# Altium PCB MFRC522开发学习板.PcbDoc
Units mil, origin at the board's own origin, x right, y up, seen from the top; angles counter-clockwise.
Board outline 3937.01 x 2165.35 mil, 2 copper layers (TOP, BOTTOM); 62 components, 68 nets, 275 pads, 250 vias.
Unrouted connection lines stored in the file: 10.
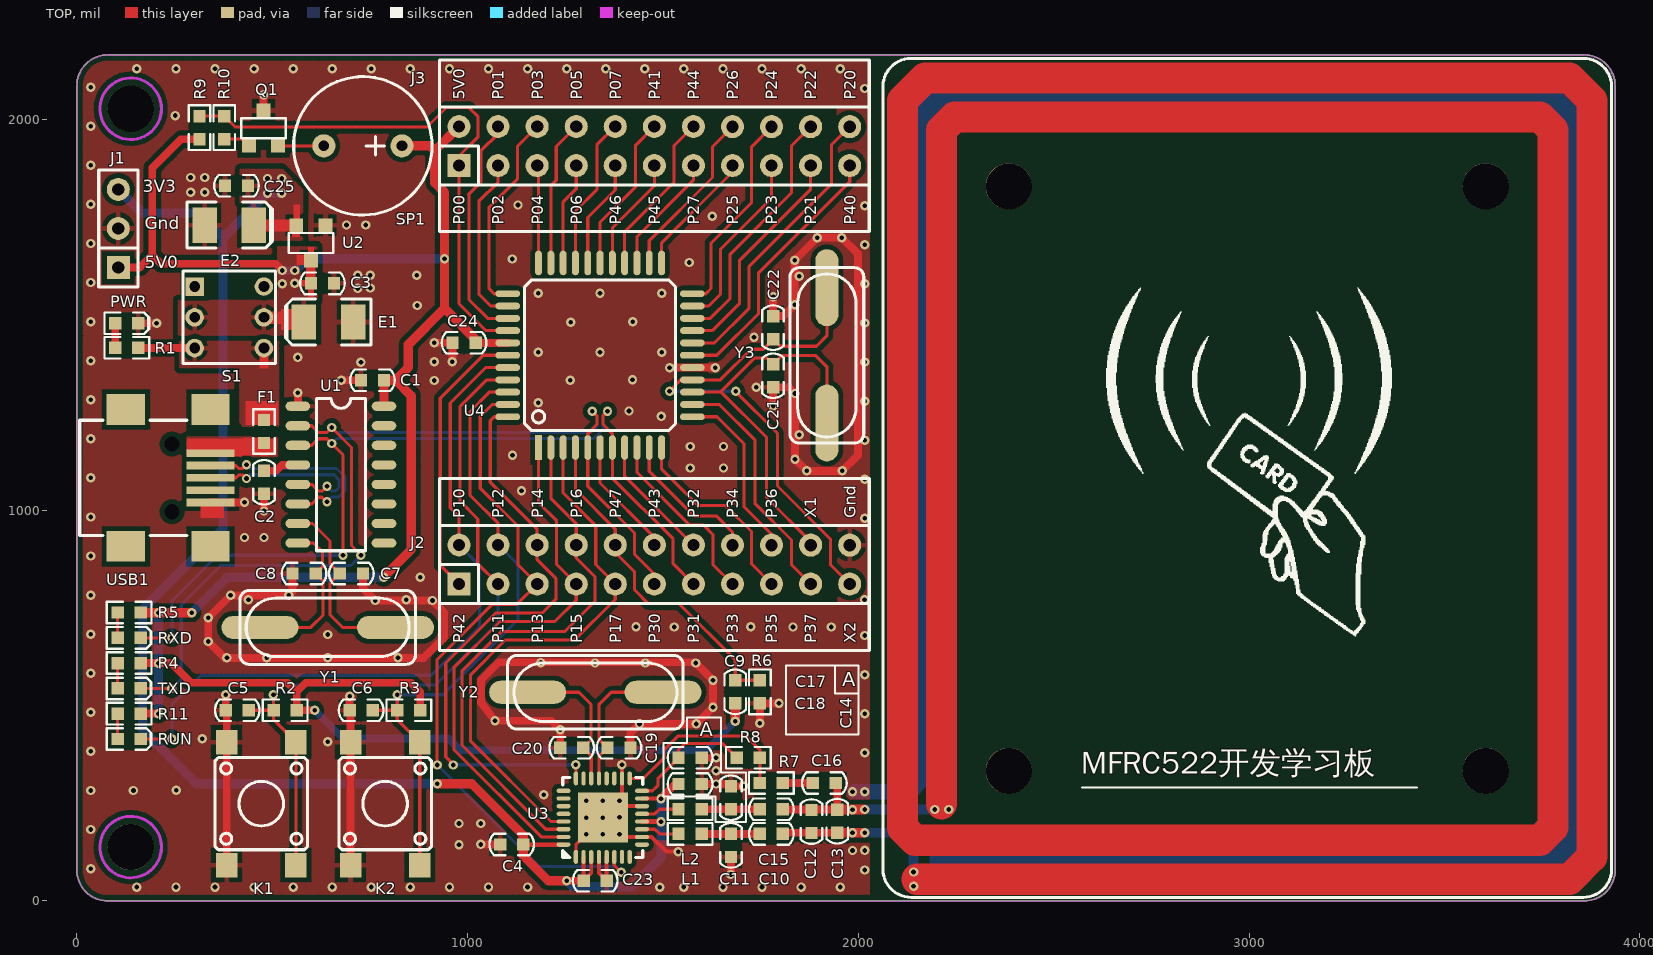
[diagram p0: TOP view]
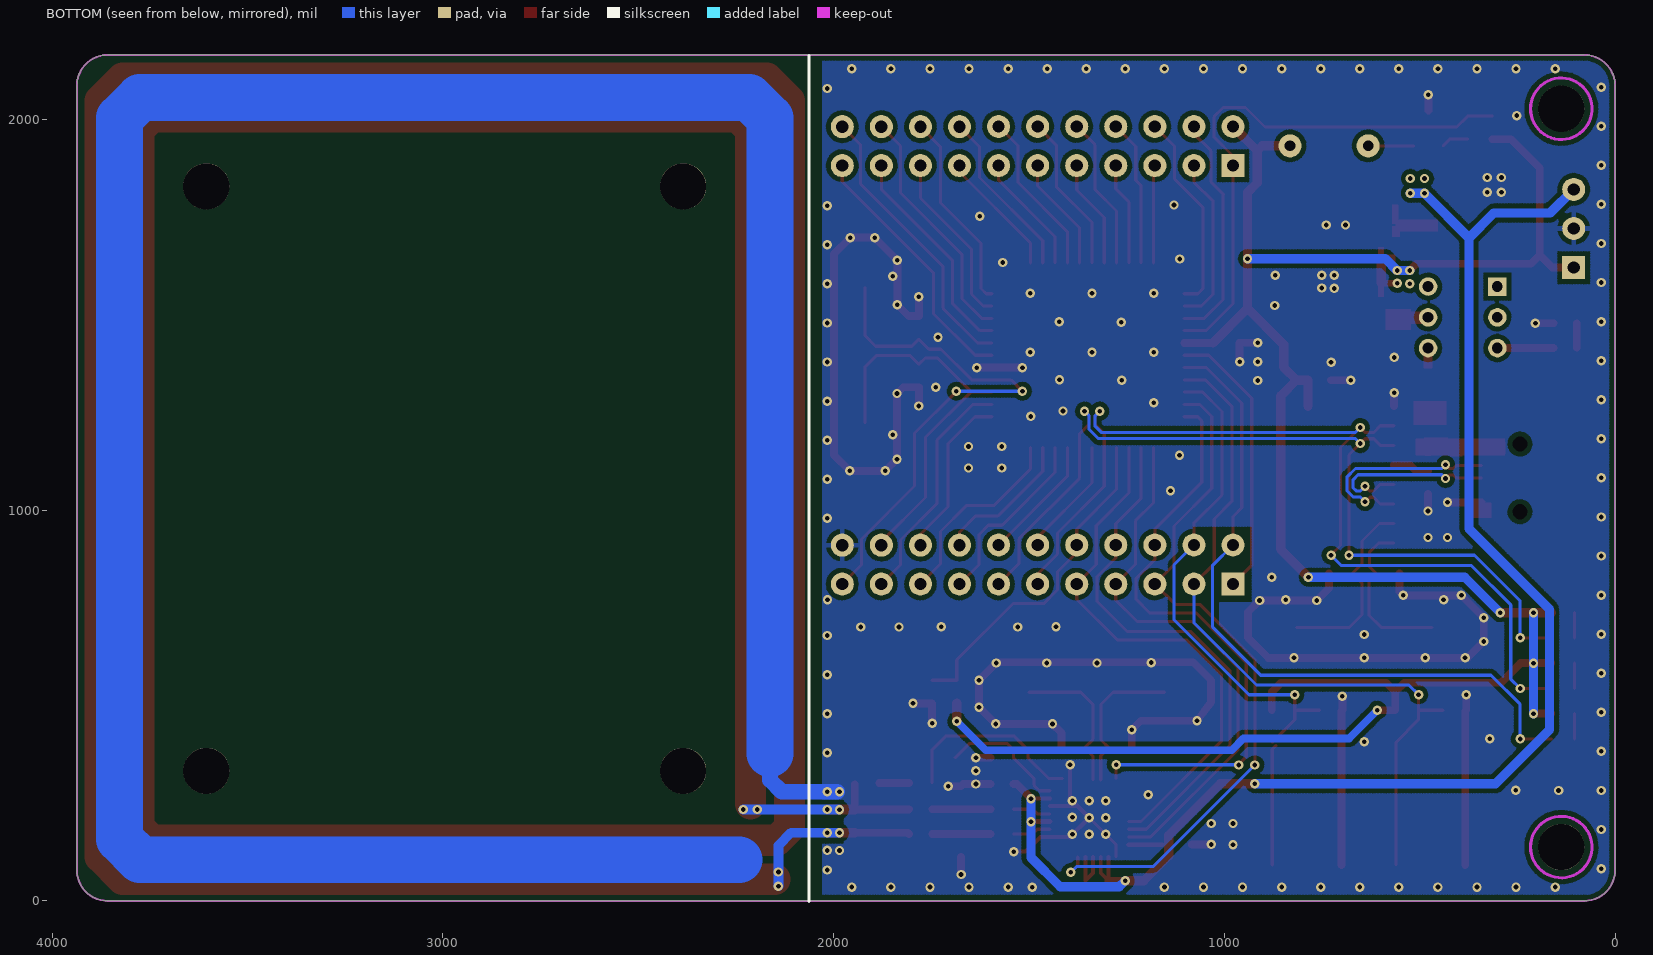
[diagram p1: BOTTOM view, seen from below]

## Layer stack, top to bottom
TOP: signal copper 1.4
Dielectric: dielectric 12.6, FR-4, Dk 4.8
BOTTOM: signal copper 1.4

## Board outline
0,78.74 ccw(c78.74,78.74) 78.74,0 3858.27,0 ccw(c3858.27,78.74) 3937.01,78.74 3937.01,2086.61 ccw(c3858.27,2086.61) 3858.27,2165.35 78.74,2165.35 ccw(c78.74,2086.61) 0,2086.61

## Design rules (kind name [scope] priority, off if disabled: settings)
Clearance POLY-ALL [INPolygon] p1: gap=12
Clearance ALL [All] p2: gap=8
ComponentClearance [All] p1: gap=10 collisioncheckmode=3 verticalgap=10
DiffPairsRouting CH340 [InDifferentialPairClass('All Differential Pairs')] p1: maxlimit=10 minlimit=8 mostfreqgap=8 maxuncoupledlength=500
DiffPairsRouting USB [InDifferentialPairClass('USB')] p2: maxlimit=10 minlimit=8 mostfreqgap=8 maxuncoupledlength=500
DiffPairsRouting [All] p3: maxlimit=10 minlimit=10 mostfreqgap=10 maxuncoupledlength=500
PolygonConnect VIA-POLY [IsVia vs IsPolygon] p1: connectstyle=Direct reliefconductorwidth=10 reliefentries=4 polygonreliefangle="90 Angle"
PolygonConnect [All] p2: connectstyle=Relief reliefconductorwidth=12 reliefentries=4 polygonreliefangle="90 Angle"
RoutingVias [All] p1: holewidth=12 width=24 viastyle="Through Hole" minholewidth=12 minwidth=24 maxholewidth=12 maxwidth=24
SolderMaskExpansion [All] p1: expansion=2.5
TestPointUsage FabricationTestPointUsage [All] p1: valid=0 allowmultiple=FALSE
Testpoint FabricationTestpoint [All] p1: side=3 testpointundercomponent=TRUE minsize=40 maxsize=100 preferedsize=60 minholesize=0 maxholesize=40 preferedholesize=32 testpointgrid=1 style=297 order=0-112345678
Width PWR [InNetClass('PWR')] p1: maxlimit=200 minlimit=4 preferedwidth=20
Width [All] p2: maxlimit=200 minlimit=8 preferedwidth=8
17 further rules are at their usual default settings.

## Classes and differential pairs
differential pair class USB: USB
net class PWR: +3.3V +5V GND NetF1_2 VBUS
differential pair class CH340: CH340
differential pair USB: +NetU1_5 -NetU1_6
differential pair CH340: +CH340_RXD -CH340_TXD

## Components (designator, comment, footprint, x,y, rotation, side; value= is the part's Value field where it differs from the comment)
C1 "100nF" CAP-0603 756.47,1332.61 r0 top
C2 "10nF" CAP-0603 479,1071.47 r270 top
C3 "100nF" CAP-0603 628.53,1580.61 r180 top
C4 "100nF" CAP-0603 1113,144.61 r0 top
C5 "100nF" CAP-0603 410.53,488 r180 top
C6 "100nF" CAP-0603 727.53,488 r180 top
C7 "15pF" CAP-0603 702.53,838 r180 top
C8 "15pF" CAP-0603 581.47,838 r0 top
C9 "100nF" CAP-0603 1685,535.13 r90 top
C10 "27pF" CAP-0603 1777.47,171.61 r0 top
C11 "47pF" CAP-0603 1674,142.08 r270 top
C12 "56pF" CAP-0603 1880,203.13 r270 top
C13 "56pF" CAP-0603 1946,204.13 r90 top
C14 "47pF" CAP-0603 1674,264.13 r270 top
C15 "27pF" CAP-0603 1777.47,234.61 r0 top
C16 "15pF" CAP-0603 1913,301.61 r0 top
C17 "100nF" CAP-0603 1569.53,366.61 r0 top
C18 "100nF" CAP-0603 1569.53,299.11 r0 top
C19 "15pF" CAP-0603 1387.53,392 r0 top
C20 "15pF" CAP-0603 1266.47,392 r180 top
C21 "15pF" CAP-0603 1782,1344.08 r90 top
C22 "15pF" CAP-0603 1782,1467.13 r270 top
C23 "100nF" CAP-0603 1326.53,51.61 r0 top
C24 "100nF" CAP-0603 991,1428.61 r0 top
C25 "100nF" CAP-0603 408.47,1830.61 r0 top
E1 "47uF" CASE-B-3528 644,1481.61 r0 top
E2 "47uF" CASE-B-3528 390.01,1729.61 r180 top
F1 "0.5A" FUS-0603 479,1201.53 r90 top
J1 "1*3P" PHDR2.54-1*3P-180 106,1721 r90 top
J2 "2*11P" PHDR2.54-2*11P-180 1478,861 r0 top
J3 "2*11P" PHDR2.54-2*11P-180 1478,1932 r0 top
K1 "12*12*4.3H" SW4-SMD6*6 472,249 r90 top
K2 "12*12*4.3H" SW4-SMD6*6 789,249 r90 top
L1 "2.2uH" IND-0603 1569.53,171.61 r0 top
L2 "2.2uH" IND-0603 1569.53,234.61 r0 top
PWR "RED" LED-0603-B 127.79,1478.61 r0 top
Q1 "Y2" SOT-23-3 477.6,1977.88 r0 top
R1 "510R" RES-0603 127.79,1415.61 r180 top
R2 "10K" RES-0603 533,488 r180 top
R3 "10K" RES-0603 849.53,488 r180 top
R4 "510R" RES-0603 133.79,608.61 r180 top
R5 "510R" RES-0603 133.79,737.94 r180 top
R6 "10K" RES-0603 1748,535.13 r270 top
R7 "5.1K" RES-0603 1777.47,301.61 r0 top
R8 "820R" RES-0603 1718.47,366.61 r0 top
R9 "10K" RES-0603 314,1979.08 r270 top
R10 "1K" RES-0603 377,1979.13 r270 top
R11 "510R" RES-0603 133.79,479.27 r180 top
RUN "RED" LED-0603-R 133.79,414.61 r0 top
RXD "GREEN" LED-0603-G 133.79,673.27 r0 top
S1 "2*3P" 5.8自锁开关 390,1493.61 r270 top
SP1 "5V" BUZZER-9MM 732,1932.61 r180 top
TXD "RED" LED-0603-R 133.79,543.94 r0 top
U1 "CH340G" SOP-16 675.76,1091 r0 top
U2 "XC6206" SOT-23-3 599,1683.88 r180 top
U3 "MFRC522" HVQFN-32 1345.98,212.99 r0 top
U4 "STC12C5A60S2" LQFP-44 1339,1396.61 r0 top
USB1 "MinuUSB" "MINI USB" 342,1082.68 r270 top
Y1 "12MHZ" HC-49SMD 642,700 r0 top
Y2 "27.12MHZ" HC-49SMD 1327,534 r0 top
Y3 "12MHZ" HC-49SMD 1919.51,1396.3 r270 top
? "" 刷卡图标 3004,1339 r0 top

## Footprints (in the part's own frame and the unit in brackets; to place one, negate y for a bottom-side part, rotate by r counter-clockwise, add the part's x,y. Pads: shape width x height; smd on the part's side, far side on the other; paste and mask are expansions set on the pad)
5.8自锁开关 [mm]
  rect 1.2x1.2 hole 0.7: 1(-2,-2.25)
  round 1.2 hole 0.7: 2(-2,2.25) 3(0,-2.25) 4(0,2.25) 5(2,-2.25) 6(2,2.25)
  silkscreen extent -3,-3 3,3, body extent -2.9,-2.9 2.9,2.9, height 10
BUZZER-9MM [mm]
  round 1.5 hole 0.7: 1(-2.54,0) 2(2.54,0)
  silkscreen extent -4.5,-4.5 4.5,4.5, body extent -4.55,-4.55 4.55,4.55, height 5.7
CAP-0603 [mm]
  rect 0.8x0.8 smd: 1(-0.75,0) 2(0.75,0)
  silkscreen extent -1.45,-0.7 1.45,0.7, body extent -0.8,-0.4 0.8,0.4, height 0.6
CASE-B-3528 [mm]
  rect 1.6x2.3 smd mask+0.102: 1(-1.6,0)
  rect 1.6x2.3 smd: 2(1.6,0)
  silkscreen extent -2.79,-1.5 2.75,1.5, body extent -1.85,-1.47 1.85,1.47, height 2.03
FUS-0603 [mm]
  rect 0.8x0.8 smd: 1(-0.75,0) 2(0.75,0)
  silkscreen extent -1.45,-0.7 1.45,0.7, body extent -0.83,-0.42 0.83,0.42, height 0.36
HC-49SMD [mm]
  oval 5x1.5 smd: 1(-4.4,0) 2(4.4,0)
  silkscreen extent -5.7,-2.4 5.7,2.4, body extent -6.4,-2.41 6.4,2.42, height 4.3
HVQFN-32 [mm] "QFN, 32-Leads, Body 5.1x5.1mm (max), Pitch 0.50mm, IPC Medium Density"
  rect 3.25x3.25 smd: 0(0,0)
  oval 0.28x0.9 smd: 1(-1.75,-2.55) 2(-1.25,-2.55) 3(-0.75,-2.55) 4(-0.25,-2.55) 5(0.25,-2.55) 6(0.75,-2.55) 7(1.25,-2.55) 8(1.75,-2.55) 17(1.75,2.55) 18(1.25,2.55) 19(0.75,2.55) 20(0.25,2.55) 21(-0.25,2.55) 22(-0.75,2.55) 23(-1.25,2.55) 24(-1.75,2.55)
  oval 0.9x0.28 smd: 9(2.55,-1.75) 10(2.55,-1.25) 11(2.55,-0.75) 12(2.55,-0.25) 13(2.55,0.25) 14(2.55,0.75) 15(2.55,1.25) 16(2.55,1.75) 25(-2.55,1.75) 26(-2.55,1.25) 27(-2.55,0.75) 28(-2.55,0.25) 29(-2.55,-0.25) 30(-2.55,-0.75) 31(-2.55,-1.25) 32(-2.55,-1.75)
  silkscreen extent -2.6,-2.6 2.6,2.6, body extent -2.51,-2.52 2.51,2.5, height 0.8
IND-0603 [mm]
  rect 0.8x0.8 smd: 1(-0.75,0) 2(0.75,0)
  silkscreen extent -1.45,-0.7 1.45,0.7, body extent -0.8,-0.4 0.8,0.4, height 0.9
LED-0603-B [mm]
  rect 0.8x0.8 smd: 1(-0.75,0)
  rect 0.8x0.8 smd mask+0.102: 2(0.75,0)
  silkscreen extent -1.45,-0.7 1.45,0.7, body extent -0.81,-0.4 0.81,0.4, height 0.6
LED-0603-G [mm]
  rect 0.8x0.8 smd: 1(-0.75,0)
  rect 0.8x0.8 smd mask+0.102: 2(0.75,0)
  silkscreen extent -1.45,-0.7 1.45,0.7, body extent -0.81,-0.4 0.81,0.4, height 0.6
LED-0603-R [mm]
  rect 0.8x0.8 smd: 1(-0.75,0)
  rect 0.8x0.8 smd mask+0.102: 2(0.75,0)
  silkscreen extent -1.45,-0.7 1.45,0.7, body extent -0.81,-0.4 0.81,0.4, height 0.6
LQFP-44 [mm]
  rect 0.45x1.6 smd: 1(-4,-6)
  oval 0.45x1.6 smd: 2(-3.2,-6) 3(-2.4,-6) 4(-1.6,-6) 5(-0.8,-6) 6(0,-6) 7(0.8,-6) 8(1.6,-6) 9(2.4,-6) 10(3.2,-6) 11(4,-6) 23(4,6) 24(3.2,6) 25(2.4,6) 26(1.6,6) 27(0.8,6) 28(0,6) 29(-0.8,6) 30(-1.6,6) 31(-2.4,6) 32(-3.2,6) 33(-4,6)
  oval 1.6x0.45 smd: 12(6,-4) 13(6,-3.2) 14(6,-2.4) 15(6,-1.6) 16(6,-0.8) 17(6,0) 18(6,0.8) 19(6,1.6) 20(6,2.4) 21(6,3.2) 22(6,4) 34(-6,4) 35(-6,3.2) 36(-6,2.4) 37(-6,1.6) 38(-6,0.8) 39(-6,0) 40(-6,-0.8) 41(-6,-1.6) 42(-6,-2.4) 43(-6,-3.2) 44(-6,-4)
  silkscreen extent -4.9,-4.9 4.9,4.9, body extent -6,-6 6,6, height 1.5
"MINI USB" [mm]
  round 0 hole 1: 0(-2.2,-2.5) 0(2.2,-2.5)
  rect 0.5x3.1 smd: 1(-1.6,0) 2(-0.8,0) 3(0,0) 4(0.8,0) 5(1.6,0)
  rect 2x2.5 smd: 6(-4.45,0) 7(4.45,0) 8(-4.45,-5.5) 9(4.45,-5.5)
  silkscreen extent -3.75,-8.5 3.75,-1.52, body extent -4.95,-8.51 4.95,1.14, height 3.9
PHDR2.54-1*3P-180 [mm]
  rect 1.5x1.5 hole 0.8: 1(-2.54,0)
  round 1.5 hole 0.8: 2(0,0) 3(2.54,0)
  silkscreen extent -3.81,-1.27 3.81,1.27, body extent -3.81,-1.27 3.81,1.27, height 10.15
PHDR2.54-2*11P-180 [mm]
  rect 1.5x1.5 hole 0.8: 1(-12.7,-1.27)
  round 1.5 hole 0.8: 2(-12.7,1.27) 3(-10.16,-1.27) 4(-10.16,1.27) 5(-7.62,-1.27) 6(-7.62,1.27) 7(-5.08,-1.27) 8(-5.08,1.27) 9(-2.54,-1.27) 10(-2.54,1.27) 11(0,-1.27) 12(0,1.27) 13(2.54,-1.27) 14(2.54,1.27) 15(5.08,-1.27) 16(5.08,1.26) 17(7.62,-1.27) 18(7.62,1.26) 19(10.16,-1.27) 20(10.16,1.26) 21(12.7,-1.27) 22(12.7,1.26)
  silkscreen extent -13.97,-2.54 13.97,2.54, body extent -13.97,-2.54 13.97,2.54, height 8.67
RES-0603 [mm]
  rect 0.8x0.8 smd: 1(-0.75,0) 2(0.75,0)
  silkscreen extent -1.45,-0.7 1.45,0.7, body extent -0.8,-0.4 0.8,0.4, height 0.45
SOP-16 [mm]
  oval 1.6x0.6 smd: 1(-2.8,4.445) 2(-2.8,3.175) 3(-2.8,1.905) 4(-2.8,0.635) 5(-2.8,-0.635) 6(-2.8,-1.905) 7(-2.8,-3.175) 8(-2.8,-4.445) 9(2.8,-4.445) 10(2.8,-3.175) 11(2.8,-1.905) 12(2.8,-0.635) 13(2.8,0.635) 14(2.8,1.905) 15(2.8,3.175) 16(2.8,4.445)
  silkscreen extent -1.6,-4.94 1.6,4.94, body extent -3.04,-4.98 3.1,4.99, height 1.73
SOT-23-3 [mm]
  rect 0.9x0.9 smd: 1(-0.95,-1.15) 2(0.95,-1.15) 3(0,1.15)
  silkscreen extent -1.45,-0.65 1.45,0.65, body extent -1.45,-1.4 1.45,1.4, height 1.2
SW4-SMD6*6 [mm]
  rect 1.6x1.4 smd: 1(-4,2.25) 2(4,2.25) 3(-4,-2.25) 4(4,-2.25)
  silkscreen extent -3,-3 3,3, body extent -4.06,-3.01 4.15,3.09, height 3.8
刷卡图标 [mil]
  silkscreen extent -369,-660 361,230

## Part data
C1 C2 C3 C4 C5 C6 C7 C8 C9 C10 C11 C12 C13 C14 C15 C16 C17 C18 C19 C20 C21 C22 C23 C24 C25: library part CAP1
E1 E2: library part CAP+
F1: library part FUSE
J1: library part HDR1*3
J2 J3: library part HDR2*11
K1 K2: library part KEY2
L1 L2: library part IND
PWR RUN RXD TXD: library part LED1
Q1: library part PNP
R1 R2 R3 R4 R5 R6 R7 R8 R9 R10 R11: library part RES1
S1: library part HDR2*3
SP1: library part BEEP
U3: library part RC522
U4: library part STC12C5Axx-LQFP44
USB1: library part MiniUSB
Y1 Y2 Y3: library part XTAL

## Free pads (board coordinates)
  round 118.11 hole 118.11 unplated: 0(137.8,137.8) 0(2385.27,332.82) 0(2385.27,1828.89) 0(3605.74,332.82) 0(3605.74,1828.89) 4(137.8,2027.56)

## Via types
v1: diameter 24, hole 12, TOP to BOTTOM, tented both sides, 250 vias

## Nets (pads, with @x,y where several pads share a name; then routed paths per layer and width w, separated by ;. In a path a pad name is that pad's centre, name@x,y a point inside that pad or via, vN(x,y) a via of type N, cw(c..) or ccw(c..) an arc to the next point about the centre after c; other vN are vias at no path point)
+3.3V: C4.2 C18.1 C23.1 C25.2 E2.1 J1.3 U2.2 U3.2 U3.3 U3.12 U3.15 U3.32 | length 3985.9
  TOP w10: C23.1@1296.79,51.82 U3.2 ; C23.1 1316.47,71.08 U3.3 ; U3.15 v1@1494.45,262.21
  TOP w12: C4.2@1157.5,144.1 U3.32 ; C23.1@1296.79,51.82 C23.1 ; U3.12@1446.39,203.16 1494.45,203.16 v1(1495,202.61)
  TOP w20: v1(1254,51.61) C23.1 ; v1@1494.45,262.21 1531.34,299.11 C18.1
  TOP w24: v1(922,300) 1010.61,300 1142.53,168.08 C4.2 1142.53,115.47 1206.39,51.61 v1(1254,51.61)
  BOTTOM w24: J1.3 166.39,1760.61 310.39,1760.61 374,1697 ; v1(524,1811) v1(488,1811) 374,1697 ; v1(922,300) 306,300 168,438 168,746.61 374,952.61 374,1697 ; v1(1254,51.61) 1269.61,36 1420,36 1495,111 v1(1495,202.61) v1(1495,261.66)
  other v1: 488,1849 524,1849
+5V: C1.2 C3.2 C9.1 C24.2 E1.1 J1.1 J3.2 R2.1 R3.1 R4.1 R5.1 R9.2 R11.1 S1.3 S1.4 SP1.1 U1.16 U2.3 U4.38 | length 6046.4
  TOP w20: J1.1 161,1621 193,1653 ; R11.1 208.67,479.27 v1(209,478.94) ; R4.1 242,608.61 292,558.61 539.06,558.61 562.53,535.13 ; v1@208.67,737.94 v1(209,737.61) ; R9.2 266.55,1949.55 193,1876 193,1653 ; v1(526,1613.61) 509,1630.61 215.39,1630.61 193,1653 ; v1(608.61,488) R2.1 562.53,535.13 ; R3.1 879.06,534.55 855,558.61 586,558.61 562.53,535.13 ; C24.2@1029.5,1428.1 U4.38
  TOP w24: R5.1 v1@208.67,737.94 ; v1(209,737.61) v1(294,737.61) ; C3.2 U2.3 ; v1(785,828.61) 856,899.61 856,1292.61 816,1332.61 815,1332.61 ; U1.16 C1.2 815,1332.61 ; SP1.1 903.39,1932.61 916,1920 ; J3.2 916,1920 ; C24.2@1029.5,1428.1 941,1516.61 ; v1(1685,459.61) C9.1 ; 815,1332.61 848.5,1366.11 848.5,1424.11 941,1516.61 ; 916,1920 916,1838 941,1813 v1(941,1643.61) 941,1516.61
  BOTTOM w20: v1(608.61,488) 680.61,416 951,416 981.39,385.61 1611,385.61 v1(1685,459.61)
  BOTTOM w24: v1(209,478.94) v1(209,608.61) v1(209,737.61) ; v1(294,737.61) 385,828.61 v1(785,828.61) ; v1(526,1613.61) v1(558,1613.61) 588,1643.61 v1(941,1643.61)
  other v1: 526,1579.61 558,1580.61
BEEP: J3.1 R9.1 R10.1 U4.37 | length 1407
  TOP w8: R9.1 R10.1@377.06,2008.61 ; R10.1 R10.1@377.06,2008.61 ; U4.37 1047.01,1459.6 978,1528.61 J3.1 978,1906.61 1027,1955.61 1027,2006.61 1003,2030.61 946,2030.61 896,1980.61 405.06,1980.61 R10.1@377.06,2008.61
CH340_RXD: J2.13 RXD.2 U1.3 U4.7 | length 2360.5
  TOP w8: RXD.2 242.67,673.27 v1(243,673.61) ; U1.3 601.02,1166 618.02,1183 639.61,1183 v1(652,1170.61) 681,1141.61 v1(681,884.61) ; v1(1358,1253.61) 1347,1242.61 1347,1219.38 1370.5,1195.88 U4.7 1370.5,1082.11 1526,926.61 1526,863 J2.13
  BOTTOM w8: v1(243,673.61) 243,767.61 360,884.61 v1(681,884.61) ; v1(652,1170.61) 664.5,1183.11 1322.13,1183.11 1347,1207.98 1347,1242.61 v1(1358,1253.61)
CH340_TXD: J2.11 TXD.2 U1.2 U4.5 | length 2534.7
  TOP w8: TXD.2 242.67,543.94 v1(243,543.61) ; U1.2 601.02,1216 618.02,1199 639.39,1199 v1(652,1211.61) 703,1160.61 703,909.61 v1@727,885.61 ; v1(1319,1253.61) 1331,1241.61 1331,1219.38 1307.5,1195.88 U4.5 1307.5,1061.1 1427,941.61 1427,887.61 1478,836.61 J2.11
  BOTTOM w8: v1(243,543.61) 267,567.61 267,757.61 368,858.61 701,858.61 v1(727,884.61) ; v1(652,1211.61) 664.5,1199.11 1315.5,1199.11 1331,1214.61 1331,1241.61 v1(1319,1253.61)
CH340_XI: C7.2 U1.7 Y1.2 | length 491.3
  TOP w8: U1.7 603,966 648,921 648,863 C7.2 648,813 648,732 680,700 Y1.2
CH340_XO: C8.2 U1.8 Y1.1 | length 423.8
  TOP w8: Y1.1 599,700 630,731 630,819 C8.2 629,856 629,892 605,916 U1.8
GND: C1.1 C2.2 C3.1 C4.1 C5.2 C6.2 C7.1 C8.1 C11.2 C14.1 C17.2 C18.2 C19.2 C20.2 C21.1 C22.1 C23.2 C24.1 C25.1 E1.2 E2.2 J1.2 J2.22 K1.1 K1.2 K2.1 K2.2 PWR.2 Q1.3 R6.2 U1.1 U2.1 U3.0 U3.1 U3.4 U3.5 U3.10 U3.14 U3.18 U4.16 USB1.5 | length 13547.5
  TOP w8: U3.1 1277.1,144.1 v1(1346,213)
  TOP w10: U3.4@1336.16,112.61 1336.16,71.5 1355.84,51.82 U3.5 ; U3.0@1375.53,242.53 U3.14 ; U3.0@1395.21,163.79 1470.82,163.79 1508.61,126 v1(1539,126) ; U3.0@1395.21,262.21 v1@1395.21,348.39
  TOP w12: v1@1395,351 v1(1395,348.61) v1@1395.21,348.39 ; U3.0@1395.21,163.79 v1(1346,213) 1375.53,242.53 U3.0@1395.21,262.21 ; C14.1@1668.56,299.11 C14.1
  TOP w20: PWR.2 v1(204,1478.61) ; USB1.5 428.69,1019.68 v1(429,1020) ; C5.2 v1(381,527.61) ; K1.1 C5.2@383.42,485.58 ; Q1.3 477.6,2063.2 v1(478,2063.61) ; v1(479,998) C2.2 ; C8.1 551.94,791.94 v1(542,782) v1(393.39,782) v1(336,724.61) v1(336,664) 378,622 888,622 940,674 940,739 v1(910,769) v1(764,769) 732.06,800.94 C7.1 ; U1.1 v1(565.53,1301) ; v1(677,1332.61) C1.1 ; C6.2 v1(698,524) ; K2.1 C6.2@700.42,485.58 ; v1(915,1428.61) C24.1 961.47,1380.08 v1(961,1379.61) ; v1(1034,144.61) C4.1 ; C20.2 v1(1236.94,438.06) 1214,461 v1(1070,461) 1034,509 1034,564.37 1079.52,611 1582,611 v1(1584,609) v1(1628,565) v1(1628,496) v1(1585,453) v1(1440,453) 1417.06,430.06 C19.2 ; v1(1517,1364.61) 1517.5,1365.11 U4.16 1633.5,1365.11 v1(1634,1364.61) ; C18.2 v1(1636,299.11) C14.1@1668.56,299.11 ; C17.2 v1@1641,366.61 ; v1(1674,67.61) C11.2 ; C14.1 v1(1706.94,293.66) ; v1(1748,454.61) R6.2 v1(1797,505.61) ; v1(1782,1266.61) C21.1 1822.06,1314.55 v1(1838,1298.61) v1(1838,1130.61) v1(1868,1100.61) v1(1959,1100.61) 1999,1140.61 1999,1656.61 v1(1958,1697.61) v1(1895,1697.61) v1(1837,1639.61) v1(1837,1525.61) 1808.06,1496.66 C22.1 v1(1782,1546.61)
  BOTTOM w40: v1@1990.51,279.24 2132.9,279.24 2163.01,309.35 2163.01,377.35
  BOTTOM w120: 2163.01,377.35 2163.01,2003.35 2216.01,2056.35 3775.01,2056.35 3828.01,2003.35 3828.01,158.35 3775.01,105.35 2242.51,105.35
  other v1: 153.54,35.43 253.54,35.43 353.54,35.43 453.54,35.43 553.54,35.43 653.54,35.43 753.54,35.43 853.54,35.43 953.54,35.43 1053.54,35.43 1153.54,35.43 1492,35 1553.54,35.43 1653.54,35.43 1753.54,35.43 1853.54,35.43 1953.54,35.43 2016.11,79.24 35.43,82.68 1985,129 2016.11,129.22 978,144 1304,170.39 1346,170.39 1389,170.39 35.43,182.68 978,198 1034,198 1304,213.2 1389,214 1304,256 1346,256 1389,256 1195,272 1985,279.03 2016.11,279.24 35.43,282.68 144.72,282.68 254,283 1636,333 1636,366.61 2016.11,379.24 35.43,382.68 642,407 321,415 2016.11,479.24 35.43,482.68 2016.11,579.24 35.43,582.68 1326,609 1455,609 1187,610 384,622 486,622 642,622 822,622 2016.11,679.24 642,682 35.43,682.68 1529,701 1833,701 1931,701 1431,702 1725,702 439,771 843,771 2016,771 35.43,782.68 879,828 35.43,882.68 429,930 479,930 2016.11,979.24 35.43,982.68 1138,1050 2016.11,1079.24 35.43,1082.68 1570,1108 1655,1108 1115,1141 1570,1163 1655,1163 2016.11,1179.24 35.43,1182.68 1849,1193 1496,1240 1413,1254 1181,1275 2016.11,1279.24 35.43,1282.68 1739,1315 915,1332 1263,1333 1422,1334 727,1379 2016.11,1379.24 915,1380 35.43,1382.68 565,1391 1181,1404 1339,1404 1497,1404 1733,1443 2016.11,1479.24 1264,1481 1423,1482 35.43,1482.68 871,1524 1181,1555 1339,1555 1497,1555 719,1567.61 751,1568.61 2016.11,1579.24 35.43,1582.68 1849,1599 870,1601 719,1601.61 751,1601.61 1567,1634 1114,1643 2016.11,1679.24 35.43,1682.68 690,1730 739,1730 1626,1752 2016.11,1779.24 1129,1781 35.43,1782.68 291,1813.61 327,1813.61 291,1851.61 327,1851.61 35.43,1882.68 35.43,1982.68 252,2010 2016.11,2079.24 35.43,2082.68 153.54,2129.92 253.54,2129.92 353.54,2129.92 453.54,2129.92 553.54,2129.92 653.54,2129.92 753.54,2129.92 853.54,2129.92 953.54,2129.92 1053.54,2129.92 1153.54,2129.92 1253.54,2129.92 1353.54,2129.92 1453.54,2129.92 1553.54,2129.92 1653.54,2129.92 1753.54,2129.92 1853.54,2129.92 1953.54,2129.92
KEY1: C5.1 J2.3 K1.3 K1.4 R2.2 U4.41 | length 1918.1
  TOP w8: C5.1 R2.2 ; v1@503,520.08 v1@503.47,519.61 ; v1@503.47,527.13 v1@503.47,519.61 ; K1.3 K1.4 503.47,463.59 R2.2 ; J2.3 1026,863 1026,977.61 981,1022.61 981,1265.61 1049.01,1333.61 U4.41 ; R2.2 v1@503.47,519.61
  BOTTOM w8: v1(503,527.61) 528,552.61 918,552.61 1078,712.61 J2.3
KEY2: C6.1 J2.4 K2.3 K2.4 R3.2 U4.42 | length 1607.2
  TOP w8: C6.1 R3.2 ; v1(820,527.61) R3.2 ; K2.4@868.34,397.24 877.58,388 K2.3 ; K2.4 820,464.06 R3.2 ; J2.4 1078,966.61 1006,1038.61 1006,1252.61 1055.51,1302.12 U4.42
  BOTTOM w8: v1(820,527.61) 937,527.61 1129,719.61 1129,860 J2.4
NetC2_1: C2.1 U1.4 | length 92.7
  TOP w20: C2.1 510.39,1101 525.39,1116 U1.4
NetC10_1: C10.1 C11.1 L1.2 | length 148.9
  TOP w20: L1.2 C11.1 C10.1
NetC10_2: C10.2 C12.1 C12.2 C13.1 C13.2 C15.2 C16.2 | length 15330.8
  TOP w8: C15.2 1945.06,234.61 C13.2 ; C16.2 C16.2@1946,298.13
  TOP w20: C10.2 1810,174.61 C13.1 ; C15.2 1807.94,233.66 C13.2 C16.2@1946,298.13 ; 1968.51,233.66 v1@1996.94,233.66
  TOP w25: C13.1 1990.51,174.61 v1(2016.11,174.61) ; C13.2 1968.51,233.66 1968.51,233.85 1990.51,233.85 v1(2016.11,233.85)
  TOP w80: 2150.51,55.35 3820.01,55.35 3878.01,113.35 3878.01,2048.35 3820.01,2106.35 2171.01,2106.35 2113.01,2048.35 2113.01,187.35 2145.01,155.35 3745.01,155.35 3778.01,188.35 3778.01,1973.35 3745.01,2006.35 2246.01,2006.35 2213.01,1973.35 2213.01,247.85
  BOTTOM w20: v1@2231.26,233.85 2231.51,233.61 v1(2231.51,233.85)
  BOTTOM w25: v1@1986.38,174.61 2021.51,174.61 2108.76,174.61 2141.51,141.85 v1(2141.51,73.85) v1(2141.51,37.85) ; v1@1986.38,233.85 2021.51,233.85 v1(2195.51,233.85) v1@2231.26,233.85
  other v1: 1985,174.39 1985,233.64
NetC14_2: C14.2 C15.1 L2.2 | length 148.9
  TOP w20: L2.2 C14.2 C15.1
NetC16_1: C16.1 R7.2 | length 76.5
  TOP w20: R7.2 C16.1
NetC17_1: C17.1 R8.1 U3.16 | length 330.3
  TOP w8: U3.16 1473.29,281.9 1487.65,296.25 1487.65,314.25 C17.1 1540,387.61 1555,402.61 1652.94,402.61 R8.1
NetC19_1: C19.1 U3.21 Y2.2 | length 388.2
  TOP w8: U3.21@1336.16,309.39 1336.16,370.16 C19.1 1336,414 1336,502 1368,534 Y2.2
NetC20_1: C20.1 U3.22 Y2.1 | length 385.4
  TOP w8: Y2.1 1285,534 1316,503 1316,412 C20.1 1316.47,371.53 U3.22@1316.47,309.39
NetF1_2: F1.2 R1.1 S1.5 S1.6 | length 144.8
  TOP w12: R1.1@157.32,1414.87 R1.1
  TOP w20: R1.1@157.32,1414.87 S1.5
NetL1_1: L1.1 U3.11 | length 98.5
  TOP w8: U3.11 1479.13,183.47 1491,171.61 L1.1
NetL2_1: L2.1 U3.13 | length 98.5
  TOP w8: U3.13 1479.24,222.84 1491,234.61 L2.1
NetPWR_1: PWR.1 R1.2 | length 63
  TOP w20: R1.2 PWR.1
NetQ1_1: Q1.1 R10.2 | length 70.2
  TOP w8: R10.2 423.2,1949.61 Q1.1
NetQ1_2: Q1.2 SP1.2 | length 117
  TOP w8: Q1.2 SP1.2
NetR4_2: R4.2 TXD.1 | length 64.7
  TOP w8: TXD.1 R4.2
NetR5_2: R5.2 RXD.1 | length 64.7
  TOP w8: RXD.1 R5.2
NetR7_1: R7.1 R8.2 U3.17 | length 489.4
  TOP w8: U3.17 1449.79,313.39 1503,366.61 1503,386.61 1538,421.61 1713.39,421.61 1748,387 R8.2 1747.94,366.55 R7.1
NetR11_2: R11.2 RUN.1 | length 64.7
  TOP w8: RUN.1 R11.2
NetU1_5: U1.5 USB1.3 | length 493.1
  TOP w8: USB1.3 407.02,1082.68 414.77,1090.43 424,1090.43 433.43,1081 v1(434,1081) v1@432.32,1082.68 ; U1.5 601.02,1066 618.02,1049 628,1049 v1(640,1061)
  BOTTOM w8: v1(434,1081) 443.61,1090.61 658,1090.61 670.5,1078.11 670.5,1057 663,1049.5 651.5,1049.5 v1(640,1061)
NetU1_6: U1.6 USB1.2 | length 545.9
  TOP w8: USB1.2 407.02,1114.17 414.77,1106.43 424,1106.43 433.57,1116 v1(434,1116) v1@432.17,1114.17 ; U1.6 601.02,1016 618.02,1033 627,1033 638,1022 v1(640,1022)
  BOTTOM w8: v1(434,1116) 443.39,1106.61 664.63,1106.61 686.5,1084.73 686.5,1050.37 669.63,1033.5 651.5,1033.5 v1(640,1022)
P0.1: J3.4 U4.36 | length 593.1
  TOP w8: 1003,1808.61 1034,1839.61 1034,1919.61 1078,1963.61 J3.4 ; 1003.67,1808.61 1003.67,1538.94 1051.51,1491.09 U4.36
P0.2: J3.3 U4.35 | length 435.8
  TOP w8: 1029,1790.61 1078,1839.61 J3.3 ; 1029.33,1790.61 1029.33,1552.27 1059.02,1522.59 U4.35
P0.3: J3.6 U4.34 | length 519.3
  TOP w8: U4.34 1067.52,1554.09 1055,1566.61 1055,1775.61 1128,1848.61 1128,1932 J3.6
P0.4: J3.5 U4.33 | length 250.6
  TOP w8: J3.5 1181.52,1878.48 U4.33
P0.5: J3.8 U4.32 | length 376.1
  TOP w8: U4.32 1213.02,1830.62 1227,1844.61 1227,1931 J3.8
P0.6: J3.7 U4.31 | length 263
  TOP w8: U4.31 1244.51,1789.12 1278,1822.61 J3.7
P0.7: J3.10 U4.30 | length 391.4
  TOP w8: U4.30 1276.01,1765.61 1331,1820.61 1331,1935 J3.10
P1.0: J2.2 RUN.2 U4.40 | length 1826.2
  TOP w8: RUN.2 v1(243,414.61) ; J2.2 978,983.61 955.6,1006.01 955.6,1274.21 1046.5,1365.11 U4.40
  BOTTOM w8: v1(243,414.61) 243,503 317.61,577.61 907,577.61 1030,700.61 1030,859 J2.2
P1.3: J2.5 U3.6 U4.43 | length 1810.1
  TOP w8: v1(922,348) 922,618 1063,759 1126,759 J2.5 1129,860 1129,959.61 1032.4,1056.21 1032.4,1240.01 1063.02,1270.62 U4.43 ; U3.6 1375.51,90.49 v1(1393,73)
  BOTTOM w8: v1(922,348) 1182,88 1378,88 v1(1393,73)
P1.4: J2.6 U3.24 U4.44 | length 1550.8
  TOP w8: v1(963,348) 963,350 944,369 944,609 1072,737 1191,737 1226,772 1226,825.61 1178,873.61 J2.6 1178,951.61 1058,1071.61 1058,1228.61 1068.52,1239.13 U4.44 ; v1(1277,348.61) 1277,352.4 1277.1,352.3 U3.24
  BOTTOM w8: v1(963,348) 963.61,348.61 v1(1277,348.61)
P1.5: J2.7 U3.31 U4.1 | length 1397.9
  TOP w8: U4.1 1181.52,1019.09 1228,972.61 1228,861 J2.7 1278,769.61 1223.39,715 1083,715 965,597 965,387.61 1188.82,163.79 U3.31
P1.6: J2.8 U3.30 U4.2 | length 1393.8
  TOP w8: U4.2 1213.02,1030.59 1278,965.61 J2.8 1278,877.61 1326,829.61 1326,766.61 1249.39,690 1087,690 986,589 986,397.61 1200.13,183.47 U3.30
P1.7: J2.9 U3.29 U4.3 | length 1387.8
  TOP w8: U4.3 1244.51,1044.09 1328,960.61 1328,861 J2.9 1378,771.61 1274.39,668 1097,668 1007,578 1007,409.61 1213.45,203.16 U3.29@1245.61,203.16
P2.0: J3.22 U4.18 | length 733.3
  TOP w8: U4.18@1595.22,1428.1 1631.5,1428.1 1720.6,1517.21 1720.6,1624.21 1931,1834.61 1931,1934.61 J3.22
P2.1: J3.19 U4.19 | length 557.6
  TOP w8: U4.19@1595.22,1459.6 1625.99,1459.6 1696.2,1529.81 1696.2,1639.81 1878,1821.61 J3.19
P2.2: J3.20 U4.20 | length 622.7
  TOP w8: U4.20@1595.22,1491.09 1621,1491.09 1671.8,1541.89 1671.8,1655.41 1829,1812.61 1829,1932.61 J3.20
P2.3: J3.17 U4.21 | length 447.9
  TOP w8: U4.21@1595.22,1522.59 1616.98,1522.59 1647.4,1553.01 1647.4,1668.01 1778,1798.61 J3.17
P2.4: J3.18 U4.22 | length 511.6
  TOP w8: U4.22@1595.22,1554.09 1609.48,1554.09 1623,1567.61 1623,1683.61 1727,1787.61 1727,1930.61 J3.18
P2.5: J3.15 U4.23 | length 324.4
  TOP w8: U4.23 1496.48,1684.09 1678,1865.61 J3.15
P2.6: J3.16 U4.24 | length 437
  TOP w8: U4.24 1464.98,1689.59 1627,1851.61 1627,1930.61 J3.16
P2.7: J3.13 U4.25 | length 309
  TOP w8: U4.25 1433.49,1700.09 1578,1844.61 J3.13
P3.2: J2.14 U4.8 | length 322.3
  TOP w8: U4.8 1401.99,1087.01 J2.14
P3.3: J2.15 U4.9 | length 471.2
  TOP w8: U4.9 1433.49,1097.12 1569,961.61 1604,961.61 1627.9,937.71 1627.9,861.1 J2.15
P3.4: J2.16 U4.10 | length 371.6
  TOP w8: U4.10 1464.98,1099.62 1579,985.61 1636.39,985.61 1678,944 J2.16
P3.5: J2.17 U4.11 | length 507.2
  TOP w8: U4.11 1496.48,1105.13 1590,1011.61 1660.39,1011.61 1726.5,945.5 1726.5,862.5 J2.17
P3.6: J2.18 U4.12 | length 429.6
  TOP w8: U4.12@1595.22,1239.13 1638.48,1239.13 1707,1170.61 1707,1009.61 1778,938.61 J2.18
P3.7: J2.19 U4.13 | length 605.3
  TOP w8: U4.13@1595.22,1270.62 1643.98,1270.62 1736,1178.61 1736,1016.61 1829,923.61 1829,860 J2.19
P4.0: J3.21 U4.17 | length 669
  TOP w8: U4.17@1595.22,1396.61 1638,1396.61 1745,1503.61 1745,1607.61 1978,1840.61 J3.21
P4.1: J3.12 U4.28 | length 406.7
  TOP w8: U4.28 1339,1736.61 1430,1827.61 1430,1934 J3.12
P4.2: J2.1 U4.39 | length 713.8
  TOP w8: J2.1 930,859 930,1286.61 1040,1396.61 U4.39
P4.3: J2.12 U4.6 | length 307
  TOP w8: U4.6 1339,1069.61 1478,930.61 J2.12
P4.4: J3.14 U4.26 | length 422.1
  TOP w8: U4.26 1401.99,1712.6 1528,1838.61 1528,1932 J3.14
P4.5: J3.11 U4.27 | length 293.7
  TOP w8: U4.27 1370.5,1722.1 1478,1829.61 J3.11
P4.6: J3.9 U4.29 | length 278.4
  TOP w8: U4.29 1307.5,1749.11 1378,1819.61 J3.9
P4.7: C9.2 J2.10 R6.1 U4.4 | length 874.4
  TOP w8: U4.4 1276.01,1053.6 1378,951.61 J2.10 1378,891.61 1427,842.61 1427,796 1462,761 1541,761 1685,617 C9.2 R6.1
VBUS: F1.1 USB1.1
XTAL1: C21.2 J2.20 U4.14 Y3.2 | length 1021.1
  TOP w8: U4.14@1595.22,1302.12 1646.49,1302.12 ; J2.20 1878,919.61 1765,1032.61 1765,1186.61 1649.49,1302.12 1646.49,1302.12 ; Y3.2 1919.51,1367.09 1891,1395.61 1804,1395.61 C21.2 1766.25,1389.35 1733.72,1389.35 1646.49,1302.12
XTAL2: C22.2 J2.21 U4.15 Y3.1 | length 1383
  TOP w8: v1(1517,1304.61) 1546.01,1333.61 1647.01,1333.61 1725.39,1412 1756.39,1412 C22.2 1800,1419.61 1893,1419.61 1919.51,1446.12 Y3.1 ; v1(1686,1304.61) 1686,1303.61 1793,1196.61 1793,1062 1929,926 1929,860 J2.21
  BOTTOM w8: v1(1517,1304.61) v1(1686,1304.61)
pads on no net: S1.1 S1.2 U1.9 U1.10 U1.11 U1.12 U1.13 U1.14 U1.15 U3.7 U3.8 U3.9 U3.19 U3.20 U3.23 U3.25 U3.26 U3.27 U3.28 USB1.0 USB1.4 USB1.6 USB1.7 USB1.8 USB1.9

## Polygon pours and split planes (outlines as drawn)
GND on TOP "Top Layer-No Net" (hatched 90Degree grid 4 track 5, remove dead copper, pour order 29): 78.74,2165.35 2028,2165.35 2028,640.96 2028,0 78.74,0 cw(c78.74,78.74) 0,78.74 0,92 0,2086.61 cw(c78.74,2086.61) 78.74,2165.35
VBUS on TOP "Top Layer-No Net" (hatched 90Degree grid 4 track 5, remove dead copper, pour order 2): 513,1187 513,1137 284,1137 282,1137 282,1175 282,1187
NetF1_2 on TOP "Top Layer-No Net" (hatched 90Degree grid 4 track 5, remove dead copper, pour order 6): 418,1246.61 418,1224.18 425.39,1215 516,1215 516,1431.61 264,1431.61 264,1364.61 418,1364.61
+5V on TOP "Top Layer-No Net" (hatched 90Degree grid 4 track 5, remove dead copper, pour order 14): 260,1536.61 515,1536.61 515,1608.61 515,1674 614,1674 614,1448.61 287,1448.61 260,1448.61 260,1447.61
+3.3V on TOP "Top Layer-No Net" (hatched 90Degree grid 4 track 5, remove dead copper, pour order 16): 419,1872.61 419,1691.61 578,1691.61 578,1819.61 538,1859.61 525,1872.61
GND on TOP "Top Layer-No Net" (hatched 90Degree grid 4 track 5, remove dead copper, pour order 18): 271,1868.61 398,1868.61 398,1853.61 398,1790.61 379,1790.61 380,1790.61 380,1694.61 380,1660.61 258,1660.61 255,1660.61 255,1869.61
GND on TOP "Top Layer-No Net" (hatched 90Degree grid 4 track 5, remove dead copper, pour order 22): 655,1412.61 791,1412.61 791,1577.61 791,1779.61 620,1779.61 614,1779.61 614,1736.61 614,1695.61 635,1695.61 638,1695.61 638,1530.61 638,1412.61 658,1412.61
GND on BOTTOM "Top Layer-No Net" (hatched 90Degree grid 4 track 5, remove dead copper, pour order 31): 78.74,2165.35 2028,2165.35 2028,640.96 2028,0 78.74,0 cw(c78.74,78.74) 0,78.74 0,92 0,2086.61 cw(c78.74,2086.61) 78.74,2165.35

## Keep-outs
TOP:
  circle w7.87: c137.8,137.8 r78.74
  circle w7.87: c137.8,2027.56 r78.74
BOTTOM:
  circle w7.87: c137.8,137.8 r78.74
  circle w7.87: c137.8,2027.56 r78.74
Keep-Out Layer:
  the board outline again, w5

## Other copper
TOP:
  rectangle net VBUS: 282,1140 511,1183
  rectangle net +3.3V: 554,1732 571,1783
  rectangle net +3.3V: 551,1698.94 571,1728
  rectangle net +3.3V: 453,1713 562,1744
  rectangle net +5V: 591,1650 607,1674
  rectangle net +5V: 591,1546 607,1580.61
  rectangle net +5V: 561.92,1628 599,1655
  rectangle net +5V: 559,1573 595,1589
  rectangle net +5V: 523,1460.61 588,1515
  rectangle net +5V: 478,1476 527,1509
  rectangle net GND: 316,980 377,1020
  rectangle net NetF1_2: 467,1363 490,1418
  rectangle net NetF1_2: 466,1230 490,1273
  rectangle net VBUS: 485,1159 507.25,1180
  rectangle net VBUS: 427,1158 490,1186
  rectangle net VBUS: 471,1139 487,1167
  rectangle net VBUS: 319,1145.67 364,1177.51
  rectangle net VBUS: 281,1142 297,1175
  rectangle net VBUS: 390,1137 423,1157
  rectangle net NetF1_2: 431,1218.61 516,1279
  pour cut-out: 928,961 928,760 1947.76,760 1947.76,961
  pour cut-out: 928,2032 928,1831 1947,1831 1947,2032
  pour cut-out: 2048.51,147 1967,147 1967,260.85 2048.51,260.85
  pour cut-out: 76.7,765.5 193,765.5 193,387.05 76.7,387.05
  pour cut-out: 974.27,1401.05 1008.01,1401.05 1008.01,1435.35 974.01,1435.35
  pour cut-out: 1586.26,394.17 1521,394.17 1521,250 1590,250
  pour cut-out: 1935,301 1731,301 1731,229 1938,229
  pour cut-out: 714,545 714,460 818,460 818,545
  pour cut-out: 1664,594 1775.56,594 1775.56,518 1667,518
  pour cut-out: 1249.74,419.56 1249.74,369 1286,369 1286,419.56
  pour cut-out: 1354.5,422.25 1354.5,365 1411,365 1411,422.25
  pour cut-out: 678,876 678,809.75 730,809.75 730,875
  pour cut-out: 451,1086 451,1051 549,1051 549,1099
  pour cut-out: 278.29,1231 278.29,1197 374,1197 374,1221
  pour cut-out: 763,1362.85 763,1304.36 735,1304.36 735,1360.85
  pour cut-out: 114,1506 114,1436 144,1436 144,1506
  pour cut-out: 320,1980 320,1920 523,1920 523,1976
  pour cut-out: 1309,58 1309,26 1349,26 1349,63
  text "TOP" at 133,2264 h100
BOTTOM:
  pour cut-out: 928,960 1083.39,960 1083.39,763 928,763
  pour cut-out: 2048.51,144.36 1971.86,144.36 1971.86,260.85 2048.51,260.85
  text "BOTTOM" at 674,2264 h100

## Silkscreen, mask and mechanical layers (free items; w line width, h text height)
Top Overlay:
  lines w5: 1940,602 1940,531 2000.51,531 ; 2572,290 3430,290 ; 1501,267 1635,267 1635,202 1713,202 1713,329 1648,329 1648,470 1562,470 1562,404 1501,404 1501,267 ; 1815,426 1815,602 1859,602 2000.51,602 2000.51,426 1933,426 1815,426
  lines w7.87: 928,763 928,640.96 2028,640.96 2028,760 ; 928,960 928,1081 2028,1081 2028,961 ; 928,1832 928,1713 2028,1713 2028,1831 ; 928,2033 928,2151.96 2028,2151.96 2028,2032 ; 2063.01,81.3 ccw(c2135.31,81.3) 2135.31,9 3855.71,9 ccw(c3855.71,81.3) 3928.01,81.3 3928.01,2084.05 ccw(c3855.71,2084.05) 3855.71,2156.35 2135.31,2156.35 ccw(c2135.31,2084.05) 2063.01,2084.05 2063.01,81.3
  text "5V0" at 993,2051.06 h30 r90
  text "P01" at 1093,2051.06 h30 r90
  text "P03" at 1193,2051.06 h30 r90
  text "P05" at 1293,2051.06 h30 r90
  text "P07" at 1393,2051.06 h30 r90
  text "P41" at 1493,2051.06 h30 r90
  text "P44" at 1593,2051.06 h30 r90
  text "P26" at 1693,2051.06 h30 r90
  text "P24" at 1793,2051.06 h30 r90
  text "P22" at 1893,2051.06 h30 r90
  text "P20" at 1993,2051.06 h30 r90
  text "3V3" at 169,1802.32 h55
  text "P00" at 993,1731 h30 r90
  text "P02" at 1093,1731 h30 r90
  text "P04" at 1193,1731 h30 r90
  text "P06" at 1293,1731 h30 r90
  text "P46" at 1393,1731 h30 r90
  text "P45" at 1493,1731 h30 r90
  text "P27" at 1593,1731 h30 r90
  text "P25" at 1693,1731 h30 r90
  text "P23" at 1793,1731 h30 r90
  text "P21" at 1893,1731 h30 r90
  text "P40" at 1993,1731 h30 r90
  text "Gnd" at 174,1708 h55
  text "5V0" at 174,1608 h55
  text "P10" at 993,980 h30 r90
  text "P12" at 1093,980 h30 r90
  text "P14" at 1193,980 h30 r90
  text "P16" at 1293,980 h30 r90
  text "P47" at 1393,980 h30 r90
  text "P43" at 1493,980 h30 r90
  text "P32" at 1593,980 h30 r90
  text "P34" at 1693,980 h30 r90
  text "P36" at 1793,980 h30 r90
  text "X1" at 1893,980 h30 r90
  text "Gnd" at 1993,980 h30 r90
  text "P42" at 993,659 h30 r90
  text "P11" at 1093,659 h30 r90
  text "P13" at 1193,659 h30 r90
  text "P15" at 1293,659 h30 r90
  text "P17" at 1393,659 h30 r90
  text "P30" at 1493,659 h30 r90
  text "P31" at 1593,659 h30 r90
  text "P33" at 1693,659 h30 r90
  text "P35" at 1793,659 h30 r90
  text "P37" at 1893,659 h30 r90
  text "X2" at 1993,659 h30 r90
  text "A" at 1959,548.85 h36
  text "A" at 1594,421 h36
  text "MFRC522开发学习板" at 2570,306 h100
Bottom Overlay:
  lines w7.87: 2063.01,-1.82 2063.01,2163.53
Mechanical 1:
  pour cut-out: 1099,164 1099,119 1131,119 1131,165
Drill Drawing:
  text ".Legend" at 4033,0 h30

## Dimensions
0,78.74 to 3937.01,78.74 on Mechanical 1
78.74,2165.35 to 78.74,0 on Mechanical 1